# Allegro board 1010309-900-0012_Rev-A.brd
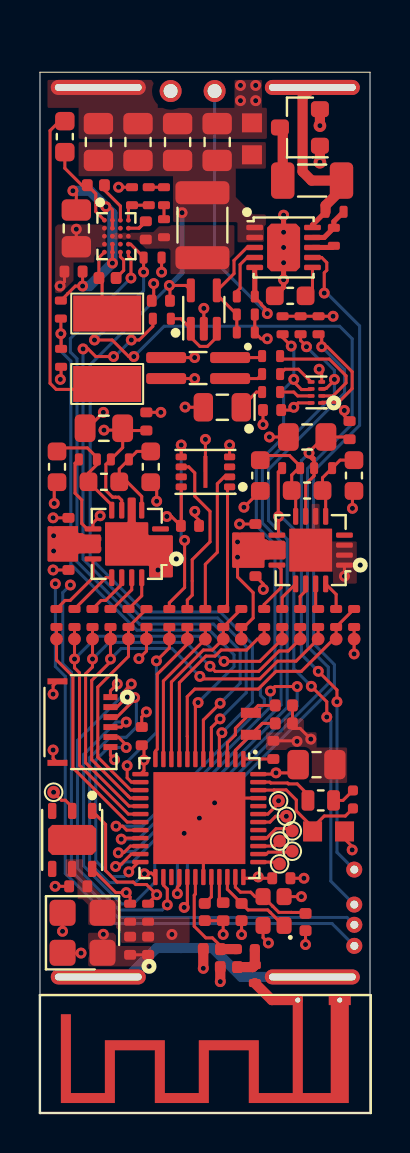
[diagram p0: board, top side]
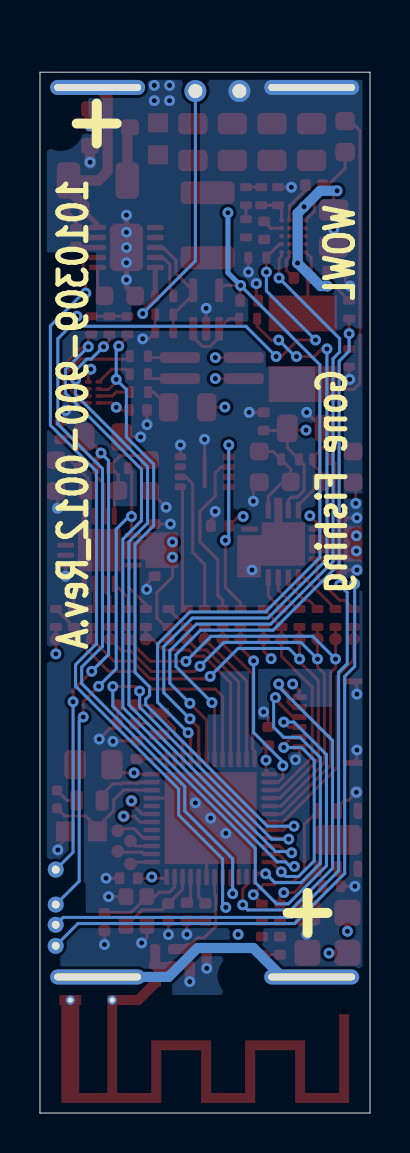
[diagram p1: board, bottom side, seen from below]

Outline 16.51 x 52.07 mm; copper layers: TOP, L2 - GND, L3 - POWER, BOTTOM. Coordinates in mm from the lower left corner of the outline.
Outline path: 0,52.07 0,0 16.51,0 16.51,52.07 0,52.07

## Design rules (mm)
constraint set DEFAULT: min track width 0.152

## Placement (name value [footprint] x y rotation side)
ANT1  Antenna_AN043  [PCBANTENNA_AN043]  8.27 3.2 180 top
B1  HHR70AAAB8T  [PANASONIC_HHR70AAAB8T]  13.62 29.06 90 bottom
B2  HHR70AAAB8T  [PANASONIC_HHR70AAAB8T]  2.92 29.06 270 bottom
C1  1.5nF  [CAPC160X80X90L35N]  0.85 32.33 90 top
C2  0.1uF  [CAPC100X50X55L20N]  1.43 29.32 90 top
C3  0.1uF  [CAPC100X50X55L20N]  1.43 27.62 90 top
C4  0.1uF  [CAPC100X50X55L20N]  5.41 8.37 270 top
C5  15nF  [CAPC160X80X90L35N]  3.2 31.58 0 top
C6  0.1uF  [CAPC100X50X55L20N]  1.92 11.34 180 top
C7  1.5nF  [CAPC160X80X90L35N]  5.54 32.33 270 top
C8  0.1uF  [CAPC100X50X55L20N]  5.32 34.6 90 top
C9  1.5nF  [CAPC160X80X90L35N]  11.02 31.89 90 top
C10  0.1uF  [CAPC100X50X55L20N]  7.5 29.38 0 top
C11  0.1uF  [CAPC100X50X55L20N]  10.78 27.31 90 top
C12  22uF  [CAPC2013X145N]  13.83 17.43 0 top
C13  15nF  [CAPC160X80X90L35N]  13.36 31.14 0 top
C14  0.1uF  [CAPC100X50X55L20N]  12.07 11.74 180 top
C15  0.1uF  [CAPC100X50X55L20N]  5.09 18.85 90 top
C16  DNP  [CAPC1005X55L25N]  9.45 7.3 180 top
C17  1.5nF  [CAPC160X80X90L35N]  15.71 31.89 270 top
C18  0.1uF  [CAPC100X50X55L20N]  15.49 34.16 90 top
C19  0.8pF  [CAPC100X50X55L25N]  8.6 8.2 180 top
C20  0.1uF  [CAPC100X50X55L20N]  10.78 29.01 90 top
C21  0.1uF  [CAPC100X50X55L20N]  11.67 18.17 90 top
C22  DNP  [CAPC1005X55L25N]  8.24 10.05 270 top
C23  12pF  [CAPC100X50X55L25N]  10.08 10.05 270 top
C24  12pF  [CAPC100X50X55L25N]  13.28 9.56 270 top
C25  100pF  [CAPC100X50X56L25N]  9.16 10.07 270 top
C26  1uF  [CAPC1608X94N]  14.44 14.09 0 top
C27  12pF  [CAPC100X50X55L25N]  12.2 19.49 180 top
C28  12pF  [CAPC100X50X55L25N]  12.2 20.39 180 top
C29  10nF  [CAPC160X80X87L35N]  1.24 48.85 270 top
C30  0.1uF  [CAPC100X50X55L20N]  1.68 42.1 180 top
C31  22uF  [CAPC2013X145N]  1.82 44.26 270 top
C32  15nF  [CAPC160X80X90L35N]  12.52 40.88 180 top
C33  1nF  [CAPC100X50X55L25N]  2.8 46.42 0 top
C34  1nF  [CAPC100X50X55L25N]  3.38 41.77 0 top
C35  47nF  [CAPC100X50X55L20N]  5.29 44.16 90 top
C36  22uF  [CAPC2013X145N]  4.9 48.58 90 top
C37  22uF  [CAPC2013X145N]  2.92 48.58 90 top
C38  22uF  [CAPC2013X145N]  8.86 48.58 90 top
C39  22uF  [CAPC2013X145N]  6.88 48.58 90 top
C40  0.1uF  [CAPC100X50X55L20N]  6.05 40.64 180 top
C41  1uF  [CAPC1608X94N]  10.6 48.74 90 top
C42  0.1uF  [CAPC100X50X55L20N]  4.51 8.37 270 top
C43  0.1uF  [CAPC100X50X55L20N]  11.61 35.17 0 top
D1  Green  [LEDC200X125X120L40N]  9.12 35.31 180 top
D2  Red/Yel  [SUNLED_XZM2CRKCYK55W-8]  7.91 37.27 0 top
F1  SF-1206SP200M-2  [FUSC320X160X117L51N]  13.61 46.65 0 top
J1  503480-0600  [MOLEX_503480-0600]  0.22 19.56 270 top
L1  3.9nH  [INDC1005X60L15]  10.3 8.2 0 top
L2  10uH  [ABRACON_AISC-0603F]  14.05 15.64 180 top
L3  15nH  [INDC1005X60L15]  15.66 15.69 270 top
L4  4.7uH  [INDM3225X240N]  8.13 44.42 90 top
NOREF  -  []  -4.58 17.4 0 top
NOREF#2  -  [unnamed#2]  6.47 6.86 0 top
NOREF#3  -  [unnamed#2]  15.49 49.28 0 top
NOREF#4  -  [unnamed#2]  15.49 41.66 0 top
Q2  DMP2035U-7  [SOT23-3P91_240X120L53X44]  13 49.31 90 top
R1  33  [RESC100X50X40L25]  2.63 24.77 90 top
R2  33  [RESC100X50X40L25]  1.73 24.77 90 top
R3  33  [RESC100X50X40L25]  0.83 24.77 90 top
R4  33  [RESC100X50X40L25]  4.43 24.77 90 top
R5  1M  [RESC100X50X40L25]  5.33 24.77 270 top
R6  33  [RESC100X50X40L25]  3.53 24.77 90 top
R7  33  [RESC100X50X40L25]  6.47 24.77 90 top
R8  33  [RESC100X50X40L25]  7.37 24.77 90 top
R9  33  [RESC100X50X40L25]  8.27 24.77 90 top
R10  10K  [RESC100X50X40L25]  10.3 39.95 0 top
R11  1M  [RESC100X50X40L25]  10.07 24.77 270 top
R12  33  [RESC100X50X40L25]  9.17 24.77 90 top
R13  33  [RESC100X50X40L25]  11.21 24.77 90 top
R14  33  [RESC100X50X40L25]  12.11 24.77 90 top
R15  33  [RESC100X50X40L25]  13.01 24.77 90 top
R16  33  [RESC100X50X40L25]  14.81 24.77 90 top
R17  1M  [RESC100X50X40L25]  15.71 24.77 270 top
R18  33  [RESC100X50X40L25]  13.91 24.77 90 top
R19  10K  [RESC100X50X40L25]  10.3 39.05 0 top
R20  10K  [RESC100X50X40L25]  1.05 40.19 90 top
R21  100  [RESC100X50X40L25]  14.16 32.26 180 top
R22  100  [RESC100X50X40L25]  11.56 36.07 180 top
R23  100  [RESC100X50X40L25]  1.06 37.78 270 top
R24  12K  [RESC200X125X70L40N]  13.36 33.82 0 top
R25  12K  [RESC200X125X70L40N]  3.2 34.26 0 top
R26  10K  [RESC100X50X40L25]  6.1 39.74 0 top
R27  10K  [RESC100X50X40L25]  6.2 44.27 270 top
R28  10K  [RESC100X50X40L25]  6.2 45.87 90 top
R29  10K  [RESC100X50X40L25]  5.44 45.87 90 top
R30  140K  [RESC100X50X40L25]  14.74 45.09 180 top
R31  100K  [RESC100X50X40L25]  14.7 43.84 90 top
R32  10K  [RESC100X50X40L25]  5.63 42.8 180 top
R33  10K  [RESC100X50X40L25]  10.3 40.85 180 top
R34  100  [RESC100X50X40L25]  11.56 36.97 180 top
R35  1M  [RESC100X50X40L25]  13.94 39.41 270 top
R36  1M  [RESC100X50X40L25]  13.04 39.41 270 top
R37  1M  [RESC100X50X40L25]  12.14 39.41 270 top
R38  10K  [RESC100X50X40L25]  4.6 45.87 270 top
R39  100  [RESC100X50X40L25]  11.56 37.87 180 top
R43  100  [RESC100X50X40L25]  2.4 32.7 180 top
R44  4.02K  [RESC100X50X40L25]  5.41 10.02 90 top
R45  4.02K  [RESC100X50X40L25]  4.51 10.02 90 top
R46  100  [RESC100X50X40L25]  4 32.7 180 top
R50  100  [RESC100X50X40L25]  12.56 32.26 180 top
R51  0  [RESC100X50X40L25]  10.75 6.95 270 top
RT1  32208551  [HERAEUS_32208551]  20.87 8.89 180 bottom
RT2  10K  [THRMRB220W45L300T300H950]  7.64 51.13 180 bottom
RT3  10k  [TE_GA10K3A1A]  17.52 11.3 180 bottom
TP1  DNP  [TP_C0635]  2.63 23.71 180 top
TP2  DNP  [TP_C0635]  1.73 23.71 180 top
TP3  DNP  [TP_C0635]  0.83 23.71 180 top
TP4  DNP  [TP_C0635]  4.43 23.71 180 top
TP5  DNP  [TP_C0635]  5.33 23.71 180 top
TP6  DNP  [TP_C0635]  3.53 23.71 180 top
TP7  DNP  [TP_C0635]  6.47 23.71 180 top
TP8  DNP  [TP_C0635]  7.37 23.71 180 top
TP9  DNP  [TP_C0635]  8.27 23.71 180 top
TP10  DNP  [TP_C0635]  0.68 16.05 90 top
TP11  DNP  [TP_C0635]  10.07 23.71 270 top
TP12  DNP  [TP_C0635]  9.17 23.71 180 top
TP13  DNP  [TP_C0635]  11.21 23.71 180 top
TP14  DNP  [TP_C0635]  12.11 23.71 180 top
TP15  DNP  [TP_C0635]  13.01 23.71 180 top
TP16  DNP  [TP_C0635]  14.81 23.71 0 top
TP17  DNP  [TP_C0635]  15.71 23.71 180 top
TP18  DNP  [TP_C0635]  13.91 23.71 180 top
TP19  DNP  [TP_C0635]  11.99 13.61 270 top
TP20  DNP  [TP_C0635]  12.62 13.1 180 top
TP21  DNP  [TP_C0635]  11.99 12.46 270 top
TP23  DNP  [TP_C0635]  11.93 15.62 180 top
TP24  DNP  [TP_C0635]  12.32 14.85 0 top
TP25  DNP  [TP_C0635]  14 49.4 270 top
TP26  DNP  [TP_C0635]  14 47.57 180 top
TP27  DNP  [TP_C0635]  12.62 14.11 90 top
TP28  5015  [TP340X180N]  3.36 36.47 0 top
TP29  5015  [TP340X180N]  3.36 40 180 top
U1  SI7051-A20-IMR  [SON7P100_300X300X80L40X40T240X150N]  1.61 13.66 180 top
U2  MS583730BA01-50  [ICDFN4_330X330X285L130X130]  2.13 9.02 180 top
U3  ADS1120IRVAT  [QFN17P50_350X350X100L40X24T214N]  4.34 28.47 90 top
U4  ADS1120IRVAT  [QFN17P50_350X350X100L40X24T214N]  13.54 28.16 90 top
U5  nRF52832-QFAA  [QFN40P600X600X90-49N]  7.97 14.76 180 top
U6  MX25V1635FZUI  [PSON9P50_200X300X60L40X25T160X20N]  8.28 32.08 90 top
U7  LTC4079EDD#TRPBF  [SON11P50_300X300X80L40X25T238X165N]  12.19 43.3 270 top
U8  TS51223  [BGA20NP40_5X4_230X190X57B26N]  3.82 43.87 270 top
U9  LPV521MG/NOPB  [SOT23-5P65_210X110L36X22N]  8.2 40.2 0 top
U10  74LVC3G07GS  [PSON8P35_135X100X35L31X16N]  13.83 36.05 90 top
Y1  32.768kHz  [DFN160X100X50-2NA]  10.55 19.47 270 top
Y2  32MHz  [OSCCC200X160X46-4NA]  11.68 10.11 90 top

## Library data of the parts
ANT1 = Antenna_Shunt
B1 B2 = BATTERY_CELL-1
C1-C43 = CAP
D1 = LED_CA
D2 = LED_BI-Color_RY
F1 = FUSE
J1 = Header_6-Pin_M2
L1-L4 = IND
Q2 = MOSFET_P-CH_GSD
R1-R39 R43-R46 R50 R51 = RES
RT1-RT3 = Thermistor
TP1-TP21 TP23-TP29 = TESTPOINT
U1 = SI7051-A20-IMR
U2 = MS583730BA01-50
U3 U4 = ADS1120IRVAT
U5 = nRF52832-QFAA
U6 = MX25V1635FZUI
U7 = LTC4079
U8 = TS51223
U9 = AMP_1X_5P
U10 = Buffer_3X_8P_OD
Y1 = XTAL1-2
Y2 = XTAL1-3_Case2-4

## Footprints (pads in the part's own frame, mm; a bottom-side part is the same pattern mirrored in y, then rotated)
ABRACON_AISC-0603F
  rrect 0.64x1.02 smd: 1(-0.64,0) 2(0.64,0)
BGA20NP40_5X4_230X190X57B26N
  round 0.24 smd: A1(-0.8,-0.6) A2(-0.8,-0.2) A3(-0.8,0.2) A4(-0.8,0.6) B1(-0.4,-0.6) B2(-0.4,-0.2) B3(-0.4,0.2) B4(-0.4,0.6) C1(0,-0.6) C2(0,-0.2) C3(0,0.2) C4(0,0.6) D1(0.4,-0.6) D2(0.4,-0.2) D3(0.4,0.2) D4(0.4,0.6) E1(0.8,-0.6) E2(0.8,-0.2) E3(0.8,0.2) E4(0.8,0.6)
CAPC100X50X55L20N
  rrect 0.49x0.6 smd: 1(-0.455,0) 2(0.455,0)
CAPC100X50X55L25N
  rrect 0.54x0.6 smd: 1(-0.43,0) 2(0.43,0)
CAPC100X50X56L25N
  rrect 0.53x0.63 smd: 1(-0.45,0) 2(0.45,0)
CAPC160X80X87L35N
  rrect 0.92x0.97 smd: 1(-0.775,0) 2(0.775,0)
CAPC160X80X90L35N
  rrect 0.89x0.93 smd: 1(-0.77,0) 2(0.77,0)
CAPC1005X55L25N
  rrect 0.54x0.6 smd: 1(-0.43,0) 2(0.43,0)
CAPC1608X94N
  rect 0.95x1 smd: 1(-0.8,0) 2(0.8,0)
CAPC2013X145N
  rrect 1.07x1.47 smd: 1(-0.92,0) 2(0.92,0)
DFN160X100X50-2NA
  rect 0.5x1 smd: 1(-0.55,0) 2(0.55,0)
FUSC320X160X117L51N
  rrect 1.17x1.82 smd: 1(-1.47,0) 2(1.47,0)
HERAEUS_32208551
  round 0.8 hole 0.4: 1(5.15,0.527) 2(5.15,-0.527)
ICDFN4_330X330X285L130X130
  rrect 1.3x1.3 smd: 1(-1,1) 2(-1,-1) 3(1,-1) 4(1,1)
INDC1005X60L15
  rrect 0.5x0.5 smd: 1(-0.45,0) 2(0.45,0)
INDM3225X240N
  rrect 1.15x2.7 smd: 1(-1.625,0) 2(1.625,0)
LEDC200X125X120L40N
  rrect 0.97x1.42 smd: 1(-0.95,0) 2(0.95,0)
MOLEX_503480-0600
  rect 0.3x0.7 smd: 1(-1.25,3.3) 2(-0.75,3.3) 3(-0.25,3.3) 4(0.25,3.3) 5(0.75,3.3) 6(1.25,3.3)
  rect 0.3x1 smd: M1(-2.04,0.65) M2(2.04,0.65)
OSCCC200X160X46-4NA
  rrect 0.85x0.75 smd: 1(-0.72,-0.525) 2(0.72,-0.525) 3(0.72,0.525) 4(-0.72,0.525)
PANASONIC_HHR70AAAB8T
  oval 0.75x4.75 hole 0.35x4.35: 1(22.25,0) 2(-22.25,0)
PCBANTENNA_AN043
  round 0.457 hole 0.254: 1(-6.725,-2.45) 2(-4.625,-2.45)
PSON8P35_135X100X35L31X16N
  rrect 0.18x0.35 smd: 1(-0.525,-0.26)
  rrect 0.18x0.34 smd: 2(-0.175,-0.265) 3(0.175,-0.265) 4(0.525,-0.265) 5(0.525,0.265) 6(0.175,0.265) 7(-0.175,0.265) 8(-0.525,0.265)
PSON9P50_200X300X60L40X25T160X20N
  rrect 0.34x0.56 smd: 1(-0.75,-1.21) 2(-0.25,-1.21) 3(0.25,-1.21) 4(0.75,-1.21) 5(0.75,1.21) 6(0.25,1.21) 7(-0.25,1.21) 8(-0.75,1.21)
  rect 1.6x0.2 smd: 9(0,0)
QFN17P50_350X350X100L40X24T214N
  rrect 0.26x0.84 smd: 1(-0.75,-1.69) 2(-0.25,-1.69) 3(0.25,-1.69) 4(0.75,-1.69) 9(0.75,1.69) 10(0.25,1.69) 11(-0.25,1.69) 12(-0.75,1.69)
  rrect 0.84x0.26 smd: 5(1.69,-0.75) 6(1.69,-0.25) 7(1.69,0.25) 8(1.69,0.75) 13(-1.69,0.75) 14(-1.69,0.25) 15(-1.69,-0.25) 16(-1.69,-0.75)
  rect 2.14x2.14 smd: 17(0,0)
QFN40P600X600X90-49N
  rrect 0.22x0.81 smd: 1(-2.2,-2.95) 2(-1.8,-2.95) 3(-1.4,-2.95) 4(-1,-2.95) 5(-0.6,-2.95) 6(-0.2,-2.95) 7(0.2,-2.95) 8(0.6,-2.95) 9(1,-2.95) 10(1.4,-2.95) 11(1.8,-2.95) 12(2.2,-2.95) 25(2.2,2.95) 26(1.8,2.95) 27(1.4,2.95) 28(1,2.95) 29(0.6,2.95) 30(0.2,2.95) 31(-0.2,2.95) 32(-0.6,2.95) 33(-1,2.95) 34(-1.4,2.95) 35(-1.8,2.95) 36(-2.2,2.95)
  rrect 0.81x0.22 smd: 13(2.95,-2.2) 14(2.95,-1.8) 15(2.95,-1.4) 16(2.95,-1) 17(2.95,-0.6) 18(2.95,-0.2) 19(2.95,0.2) 20(2.95,0.6) 21(2.95,1) 22(2.95,1.4) 23(2.95,1.8) 24(2.95,2.2) 37(-2.95,2.2) 38(-2.95,1.8) 39(-2.95,1.4) 40(-2.95,1) 41(-2.95,0.6) 42(-2.95,0.2) 43(-2.95,-0.2) 44(-2.95,-0.6) 45(-2.95,-1) 46(-2.95,-1.4) 47(-2.95,-1.8) 48(-2.95,-2.2)
  rect 4.6x4.6 smd: 49(0,0)
RESC100X50X40L25
  rrect 0.4x0.6 smd: 1(-0.45,0) 2(0.45,0)
RESC200X125X70L40N
  rrect 1.04x1.38 smd: 1(-0.94,0) 2(0.94,0)
SON7P100_300X300X80L40X40T240X150N
  rrect 0.42x0.81 smd: 1(-1,-1.45) 2(0,-1.45) 3(1,-1.45) 4(1,1.45) 5(0,1.45) 6(-1,1.45)
  rrect 2.4x1.5 smd: 7(0,0)
SON11P50_300X300X80L40X25T238X165N
  rrect 0.27x0.84 smd: 1(-1,-1.445) 2(-0.5,-1.445) 3(0,-1.445) 4(0.5,-1.445) 5(1,-1.445) 6(1,1.445) 7(0.5,1.445) 8(0,1.445) 9(-0.5,1.445) 10(-1,1.445)
  rrect 2.38x1.65 smd: 11(0,0)
SOT23-3P91_240X120L53X44
  rrect 0.8x0.9 smd: 1(-0.915,-1) 2(0.915,-1) 3(0,1)
SOT23-5P65_210X110L36X22N
  rrect 0.4x1.19 smd: 1(-0.65,-0.96) 2(0,-0.96) 3(0.65,-0.96) 4(0.65,0.96) 5(-0.65,0.96)
SUNLED_XZM2CRKCYK55W-8
  rrect 2x0.55 smd: 1(1.6,0.525) 2(-1.6,0.525) 3(1.6,-0.525) 4(-1.6,-0.525)
TE_GA10K3A1A
  round 0.8 hole 0.4: 1(1.8,0.875) 2(1.8,-0.875)
THRMRB220W45L300T300H950
  round 1.1 hole 0.7: 1(-1.1,0) 2(1.1,0)
TP340X180N
  rect 3.4x1.8 smd: 1(0,0)
TP_C0635
  round 0.635 smd: 1(0,0)
unnamed#2
  round 0 hole 1.78 unplated: (0,0)

## Nets
GND_POWER: ANT1.1(GND) B2.2 C1.1 C2.2 C3.1 C4.2 C6.2 C7.2 C8.2 C9.1 C10.2 C11.1 C12.2 C14.1 C15.2 C16.2 C17.2 C18.2 C19.2 C20.2 C21.2 C22.2 C23.2 C24.2 C25.2 C26.2 C27.1 C28.1 C30.2 C31.2 C32.2 C36.2 C37.2 C38.2 C39.2 C40.2 C41.2 C42.2 C43.1 J1.6 J1.M1 J1.M2 Q2.1 R10.2 R19.2 R23.2 R24.1 R25.1 R32.1 R38.1 RT2.2 TP10.1(TP) TP26.1(TP) U1.2 U2.1 U3.1 U3.2 U3.3 U3.6 U3.17 U4.1 U4.2 U4.3 U4.6 U4.17 U5.31 U5.45 U5.49 U6.4 U6.9 U7.11 U8.B1 U8.C1 U8.D1 U9.2(V-) U10.4 Y2.2 Y2.4
VBAT: C2.1 C3.2 C4.1 C6.1 C10.1 C11.2 C12.1 C14.2 C15.1 C20.1 C42.1 C43.2 D1.2 D2.2 D2.4 J1.1 Q2.2(S) R5.2 R11.2 R17.2 R35.1 R36.1 R37.1 R44.1 R45.1 TP5.1(TP) TP11.1(TP) TP17.1(TP) TP25.1(TP) U1.5(VDD) U2.2(VDD) U3.10 U3.11 U4.10 U4.11 U5.13 U5.36 U5.48 U6.8 U10.8
VBAT_IN: B1.1(POS) F1.2 R30.2 U7.10
ANALOGSPARE1: TP27.1(TP) U5.40
BLE_NRESET: J1.5 U5.24
BLE_SWDCLK: J1.3 U5.25
BLE_SWDIO: J1.2 U5.26
BLE_SWO: J1.4 U5.21
DIN: R1.1 R15.1 TP1.1(TP) TP15.1(TP) U5.17
DOUT: R2.1 R14.1 TP2.1(TP) TP14.1(TP) U5.18
ICHG: R26.1 U5.5
ICHG_NOT_BUFFERED: R10.1 R19.1 U7.3 U9.4
LED1: R35.2 U5.23 U10.1
LED2: R36.2 U5.22 U10.3
LED3: R37.2 U5.20 U10.6
LFSPARE2: TP21.1(TP) U5.37
LFSPARE3: TP20.1(TP) U5.38
LFSPARE4: TP19.1(TP) U5.39
MEM_CS: R11.1 R12.1 TP12.1(TP) U5.10
MEM_SCLK: R8.1 TP8.1(TP) U5.12
MEM_SDI: R7.1 TP7.1(TP) U5.14
MEM_SDO: R9.1 TP9.1(TP) U5.11
MOD_CFG: R32.2 U5.28 U8.D4
MOD_EN: U5.6 U8.E4
NCHRG: U5.29 U7.7
NTC: R50.2 RT3.2 U4.9
NTC_DRDY: R13.1 TP13.1(TP) U5.9
NTC_NCS: R16.1 R17.1 TP16.1(TP) U5.8
NTC_RTN: C18.1 R21.2 R24.2 RT3.1(C1) U4.7
PDC: C30.1 C31.1 R20.2 U8.A2 U8.B2 U8.D2 U8.E2
PDC_MEASURE: R20.1 R23.1 U5.7
RTD: R43.2 RT1.2 U3.9
RTD_DRDY: R3.1 TP3.1(TP) U5.19
RTD_NCS: R4.1 R5.1 TP4.1(TP) U5.15
RTD_RTN: C8.1 R25.2 R46.2 RT1.1(C1) U3.7
SCL: R45.2 TP23.1(TP) U1.6 U2.3 U5.43
SCLK: R6.1 R18.1 TP6.1(TP) TP18.1(TP) U5.16
SDA: R44.2 TP24.1(TP) U1.1 U2.4 U5.42
VAC1: C29.2 C33.1 U8.A1
VAC2: C34.1 TP29.1(TP) U8.E1(VAC2)
VCHG: C36.1 C37.1 C38.1 C39.1 C40.1 C41.1 L4.2 U5.4 U7.1 U7.2 U9.5
N14972901: R4.2 U3.16
N14972967: R6.2 U3.15(SCLK)
N14972993: R1.2 U3.14
N14973027: R2.2 U3.13
N14973057: R3.2 U3.12
N15057205: R12.2 U6.1
N15057239: R8.2 U6.6
N15057265: R7.2 U6.5
N15057295: R9.2 U6.2
N15062741: C16.1 L1.2 R51.1
N15062907: C19.1 L1.1 U5.30
N15063377: C21.1 U5.1
N15063381: C22.1 U5.32
N15063385: C25.1 U5.33
N15063389: C26.1 L3.2 U5.46
N15063393: L2.2 U5.47
N15063409: C27.2 U5.2 Y1.2
N15063413: C28.2 U5.3 Y1.1
N15063417: C23.1 U5.34 Y2.1
N15063421: C24.1 U5.35(XC2) Y2.3(OUTPUT)
N15063699: L2.1 L3.1
N15069355: F1.1 Q2.3
N15069411: B1.2 B2.1(POS)
N15070172: R30.1 R31.2 U7.9
N15070236: R31.1 U7.8
N15070276: C32.1 U7.6(TIMER)
N15070284: R33.2 U7.4
N15070288: R33.1 RT2.1(C1) U7.5
N15073165: C29.1 TP28.1(TP)
N15073843: C33.2 U8.A3
N15073877: C34.2 U8.E3
N15077254: C1.2 C5.1 R43.1 U3.8
N15077263: C5.2 C7.1 R46.1 U3.5
N15077599: C35.2 U8.B4
N15078736: C35.1 L4.1 R27.2 U8.C2 U8.C3 U8.C4
N15079118: R29.1 R38.2 U8.A4
N15086386: C9.2 C13.1 R50.1 U4.8
N15086624: R16.2 U4.16
N15086650: R18.2 U4.15(SCLK)
N15086654: C13.2 C17.1 R21.1 U4.5
N15086674: R15.2 U4.14
N15086718: R14.2 U4.13
N15086748: R13.2 U4.12
N15130659: R26.2 U9.1 U9.3
N15135795: R27.1 R28.1
N15135807: R28.2 R29.2
N15156180: ANT1.2 R51.2
N15172554: R34.1 U10.5
N15172558: R39.1 U10.2(3Y)
N15173046: D2.3(C-YEL) R34.2
N15173050: D2.1 R39.2
N15197976: D1.1(C) R22.2
N15197980: R22.1 U10.7

Pads without a net: U1 3 4 7; U3 4; U4 4; U5 27 41 44; U6 3 7; U8 B3 D3

## Via types
v1: diameter 0.546, hole 0.254, TOP to BOTTOM, 142 vias

## Routing (per net, layer and track width the routed paths; a pad name or vN(x,y) marks a point on that pad's centre or on a via; arc(x,y) is an arc through that point)
GND_POWER: length 54.8
  TOP w0.152: R23.2 1.06,36.74 v1(1.02,36.7) ; C24.2 v1(13.28,8.43) ; v1(0.66,18.16) 0.66,17.74 J1.M2 ; R24.1 v1(11.48,33.82) ; C17.2 15.63,31.05 v1(15.63,30.25) ; C22.2 C25.2 v1(9.16,8.93) ; C3.1 v1(0.66,27.17) ; v1(3.17,35.05) 2.38,34.26 R25.1 ; U6.9 v1(8.28,33.7) ; C4.2 C42.2 ; C18.2 15.22,34.88 v1(15.22,35.15) ; U1.2 1.61,15.31 1.27,15.65 1.07,15.65 0.68,16.04 v1(0.68,16.05) ; R32.1 v1(6.08,42.07) ; C10.2 7.96,29.66 7.74,29.87 v1(7.74,30.1) ; C21.2 12.83,18.62 v1(12.86,18.59) ; v1(11.16,34.44) C43.1 ; C40.2 5.69,40.73 v1(5.69,41.5) ; Y2.4 11.16,8.78 v1(11.43,8.51) ; C11.1 11.17,26.47 v1(11.17,26.2) ; v1(11.37,38.73) 11.06,38.73 R19.2 R10.2 ; J1.M1 0.66,21.38 v1(0.66,20.95) ; C14.1 v1(13.2,11.74) ; C23.2 v1(10.08,8.93) ; C2.2 v1(0.66,29.78) ; v1(13.55,18.71) 13.01,19.24 12.63,19.24 C27.1 C28.1 ; U4.1 v1(15.23,26.86) ; U3.1 5.9,27.59 5.9,27.37 v1(5.9,27.17) ; U9.2 v1(8.2,40.26) ; C7.2 5.84,31.26 v1(5.84,30.61) ; v1(0.76,11.34) C6.2 1.42,11.38 ; C15.2 5.09,19.81 5.32,20.04 v1(5.32,20.07) ; C9.1 v1(10.2,30.31) ; v1(1.01,41.37) 1.22,41.59 C30.2 ; C20.2 v1(9.98,29.47) ; U6.4 v1(9.49,33.42) ; v1(15.62,13.16) 15.62,13.33 15.24,13.72 C26.2 ; C8.2 v1(6.05,35.05) ; v1(3.73,17.68) 3.71,17.7 3.71,17.71 3.52,17.89 J1.6 ; v1(1.82,44.22) C31.2 1.95,43.47 ; v1(13.97,37.21) 14.09,37.08 U10.4 ; U5.45 8.97,15.76 v1(8.74,15.52) v1(7.97,14.76) 7.97,12.72 8.17,12.52 U5.31 ; v1(3.93,46.32) R38.1 ; Y2.2 v1(13.08,10.83) ; 14.75,17.63 C12.2 ; v1(0.71,30.5) 0.71,31.42 C1.1
  TOP w0.254: C32.2 12.19,41.32 v1(12.19,41.69) v1(12.19,42.54) v1(12.19,43.3) v1(12.19,44.06) v1(12.19,44.92)
  TOP w0.508: C19.2 v1(8.17,7.24) ; Q2.1 v1(14,47.57) ; C16.2 v1(9.02,6.57)
  L2 - GND w0.508: 13.97,5.97 14.68,5.97 ANT1.1
  vias: v1(3.17,8.94) v1(7.21,13.99) v1(10.03,51.41) v1(10.03,50.65) v1(10.79,51.41) v1(10.79,50.65)
VBAT: length 25.5
  TOP w0.152: C43.2 12.56,35.17 v1(12.7,35.31) 12.92,35.53 U10.8 ; v1(4.95,22.73) 5.33,23.11 TP5.1 R5.2 ; C15.1 5.2,18.29 v1(5.2,17.65) 5.2,17.13 U5.13 ; D1.2 7.27,35.31 v1(7.26,35.32) ; v1(15.71,22.97) TP17.1 R17.2 ; C14.2 10.98,11.74 ; 10.98,11.74 v1(10.92,11.81) ; 10.98,11.74 10.23,11.74 U5.36 ; C10.1 6.93,29.49 ; 6.93,29.49 6.58,29.84 v1(6.35,29.84) ; 6.93,29.49 7.07,29.63 U6.8 ; D2.2 v1(7.74,37.79) ; R37.1 R36.1 R35.1 v1(14.66,39.86) ; v1(3.87,21.46) 3.52,21.12 J1.1 ; U5.48 11.74,16.96 v1(11.81,17.02) 12.5,17.02 C12.1 ; D2.4 v1(7.74,36.74) ; TP11.1 R11.2 10.21,24.31 10.66,24.77 10.66,26.04 9.88,26.82 v1(9.88,27.81)
  TOP w0.508: Q2.2 v1(14,49.4)
  vias: v1(0.68,28.88) v1(0.68,28.12) v1(6.6,8.94) v1(9.88,28.57)
VBAT_IN: length 9.5
  TOP w0.254: R30.2 13.63,44.43 U7.10
  TOP w0.508: B1.1 13.14,50.82 13.14,47.1 13.59,46.65 F1.2 15.08,46.2 14.29,45.41 R30.2
ANALOGSPARE1: length 1.9
  TOP w0.152: U5.40 11.34,13.76 11.81,14.22 12.51,14.22 TP27.1
BLE_NRESET: length 10.8
  TOP w0.152: J1.5 3.92,18.81 4.31,18.42 v1(4.31,18.29) ; U5.24 4.93,12.56 v1(4.44,12.06)
  BOTTOM w0.152: v1(4.31,18.29) 3.43,18.29 2.79,17.65 2.79,12.62 3.58,11.83 4.21,11.83 v1(4.44,12.06)
BLE_SWDCLK: length 15.4
  TOP w0.152: U5.25 5.57,12 5.27,12 5.24,11.97 v1(5.23,11.97) ; J1.3 3.85,19.81 4.73,20.69 v1(4.73,20.78)
  BOTTOM w0.152: v1(5.23,11.97) 5.2,11.97 4.76,11.53 3.45,11.53 2.49,12.49 2.49,17.78 3.5,18.8 4.31,18.8 4.82,19.3 4.82,20.7 v1(4.73,20.78)
BLE_SWDIO: length 19
  TOP w0.152: J1.2 3.85,20.31 4.1,20.56 4.1,20.99 4.37,21.26 4.37,21.27 v1(4.57,21.46) ; U5.26 6.17,11.4 6.37,11.21 v1(6.37,10.41)
  BOTTOM w0.152: v1(6.37,10.41) 6.12,10.16 3.96,10.16 1.88,12.24 1.88,18.64 4.57,21.33 v1(4.57,21.46)
BLE_SWO: length 40.2
  TOP w0.152: v1(12.87,21.34) 11.75,21.34 v1(11.53,21.11) ; J1.4 4.06,19.31 v1(4.31,19.56) ; v1(4.07,13.7) 4.12,13.76 U5.21
  BOTTOM w0.152: v1(4.07,13.7) 4.92,13.7 11.53,20.31 v1(11.53,21.11) ; v1(12.87,21.34) 12.87,20.36 5.74,13.23 5.74,11.53 4.67,10.46 4.08,10.46 2.18,12.37 2.18,17.93 3.81,19.56 v1(4.31,19.56)
DIN: length 23.2
  TOP w0.152: R15.1 TP15.1 12.42,23.11 11.96,23.11 10.94,22.1 8.76,22.1 v1(8.51,22.35) ; R1.1 TP1.1 v1(2.63,22.71) 2.63,22.32 2.28,21.97 2.28,17.53 4.45,15.36 U5.17
  BOTTOM w0.152: v1(8.51,22.35) 7.31,23.55 3.46,23.55 v1(2.63,22.71)
DOUT: length 23.5
  TOP w0.152: v1(9.21,22.6) 11,22.6 TP14.1 R14.1 ; U5.18 4.42,14.96 1.98,17.4 1.98,22.02 1.73,22.27 v1(1.73,22.71) TP2.1 R2.1
  BOTTOM w0.152: v1(1.73,22.71) 2.86,23.85 7.95,23.85 v1(9.21,22.6)
ICHG: length 31.5
  TOP w0.152: v1(3.68,37.85) 2.79,37.85 2.41,38.23 v1(2.16,38.23) ; v1(9.01,19.72) 8.57,19.28 U5.5 ; v1(4.57,38.67) 4.96,38.67 5.65,39.36 R26.1
  BOTTOM w0.152: v1(4.57,38.67) 3.74,37.85 v1(3.68,37.85) ; v1(9.01,19.72) 10.32,21.03 10.32,23.33 8.89,24.77 5.1,24.77 2.16,27.71 v1(2.16,38.23)
ICHG_NOT_BUFFERED: length 5.7
  TOP w0.152: R19.1 R10.1 8.85,40.95 U9.4 8.87,41.16 9.71,41.99 9.71,42.65 10.35,43.3 U7.3
LED1: length 39.3
  TOP w0.152: R35.2 14.09,38.81 v1(14.09,38.34) 14.36,38.34 15.62,37.09 15.62,36.24 14.93,35.56 14.12,35.56 U10.1 ; v1(3.78,12.33) 3.9,12.45 4.06,12.45 4.57,12.96 U5.23
  BOTTOM w0.152: v1(3.78,12.33) 4,12.33 4.23,12.57 4.64,12.57 12.37,20.29 12.37,28.7 11.43,29.64 11.43,32.2 12.8,33.57 12.8,33.58 15.24,36.02 15.24,37.19 v1(14.09,38.34)
LED2: length 34.6
  TOP w0.152: R36.2 13.04,38.65 13.33,38.35 v1(13.33,38.34) ; v1(14.73,36.7) 14.73,36.66 14.33,36.26 14.28,36.26 14.25,36.23 U10.3 ; v1(3.92,13.02) 3.93,13.03 4.2,13.03 4.52,13.36 U5.22
  BOTTOM w0.152: v1(13.33,38.34) 13.95,37.72 14.17,37.72 14.73,37.16 v1(14.73,36.7) 14.73,35.94 12.49,33.71 12.49,33.7 11.13,32.33 11.13,29.51 12.06,28.58 12.06,20.42 4.72,13.08 3.98,13.08 v1(3.92,13.02)
LED3: length 32.7
  TOP w0.152: v1(12.57,38.37) 12.14,38.8 R37.2 ; v1(12.7,36.7) 12.7,36.58 13.08,36.2 13.53,36.2 U10.6 ; U5.20 4.33,14.16 4.14,14.35 v1(3.81,14.35)
  BOTTOM w0.152: v1(12.57,38.37) 12.7,38.24 v1(12.7,36.7) 12.19,36.2 12.19,33.82 10.82,32.46 10.82,29.38 11.76,28.45 11.76,22.05 11.03,21.32 11.03,20.9 11.22,20.7 11.22,20.44 5.13,14.35 v1(3.81,14.35)
LFSPARE2: length 1.1
  TOP w0.152: TP21.1 11.89,12.56 U5.37
LFSPARE3: length 1.8
  TOP w0.152: U5.38 11.33,12.96 11.42,13.05 12.57,13.05 TP20.1
LFSPARE4: length 1.2
  TOP w0.152: TP19.1 11.73,13.36 U5.39
MEM_CS: length 9.2
  TOP w0.152: U5.10 6.57,21.56 8.17,23.16 8.63,23.16 TP12.1 R12.1 R11.1
MEM_SCLK: length 7.3
  TOP w0.152: U5.12 5.77,17.91 5.77,18.11 5.87,18.2 5.87,21.96 7.37,23.46 TP8.1 R8.1
MEM_SDI: length 9.2
  TOP w0.152: v1(4.36,17.38) 4.36,16.77 4.57,16.56 U5.14 ; v1(5.82,22.62) 6.47,23.27 TP7.1 R7.1
  BOTTOM w0.152: v1(4.36,17.38) 4.36,17.57 5.82,19.04 v1(5.82,22.62)
MEM_SDO: length 7.5
  TOP w0.152: U5.11 6.17,21.61 TP9.1 R9.1
MOD_CFG: length 53.4
  TOP w0.152: U5.28 6.97,11.6 6.97,11.4 6.87,11.3 v1(6.87,10.97) ; v1(4.7,37.85) 4.44,37.85 3.61,38.67 v1(2.73,38.67) ; U8.D4 4.53,43.47 5.18,42.82 R32.2 v1(5.18,42.07)
  BOTTOM w0.152: v1(6.87,10.97) 6.87,12.72 9.27,15.11 9.27,16.33 14.42,21.49 14.42,22.31 13.38,23.35 13.38,32.23 15.62,34.47 15.62,38.73 14.99,39.36 6.21,39.36 v1(4.7,37.85) ; v1(5.18,42.07) 5.18,41.13 v1(2.73,38.67)
MOD_EN: length 33.1
  TOP w0.152: U5.6 8.17,19.66 v1(9.01,20.5) ; U8.E4 4.42,42.87 4.55,42.74 v1(4.55,41.78)
  BOTTOM w0.152: v1(4.55,41.78) 1.52,38.74 1.52,38.07 1.85,37.74 1.85,27.58 4.97,24.46 8.68,24.46 10.01,23.13 10.01,21.5 v1(9.01,20.5)
NCHRG: length 40
  TOP w0.152: v1(14.22,41.02) 14.22,42.04 14.35,42.16 14.35,42.55 14.09,42.8 U7.7 ; v1(7.21,10.29) 7.37,10.45 U5.29
  BOTTOM w0.152: v1(14.22,41.02) 14.35,41.02 15.99,39.38 15.99,34.41 13.69,32.11 13.69,23.47 14.73,22.43 14.73,21.36 9.57,16.2 9.57,14.91 7.37,12.71 7.37,10.45 v1(7.21,10.29)
NTC: length 24.5
  TOP w0.152: v1(14.35,19.81) 14.35,20.57 v1(13.57,21.35) ; R50.2 11.92,32.07 11.92,29.99 11.93,29.97 v1(11.93,29.84) 11.93,29 11.85,28.92 U4.9
  BOTTOM w0.152: v1(11.93,29.84) 12.06,29.84 12.7,29.21 12.7,22.22 v1(13.57,21.35) ; v1(14.35,19.81) 14.55,19.61 14.55,11.6 RT3.2
NTC_DRDY: length 9.6
  TOP w0.152: U5.9 6.97,21.53 8.3,22.86 8.76,22.86 9.06,23.16 10.33,23.16 10.88,23.71 TP13.1 R13.1
NTC_NCS: length 13.6
  TOP w0.152: U5.8 7.37,18.84 7.37,18.85 7.37,20.83 7.74,21.21 10.92,21.21 11.81,22.1 13.08,22.1 14.69,23.71 TP16.1 R16.1 R17.1
NTC_RTN: length 28.5
  TOP w0.152: v1(13.92,22.1) 14.86,21.17 v1(14.86,20.57) ; 13.71,32.6 R21.2 13.71,31.88 13.29,31.46 U4.7 ; 13.71,32.6 13.44,32.88 13.44,33.05 14.21,33.82 R24.2 15.37,33.82 C18.1 ; 13.71,32.6 13.71,32.76 v1(13.46,33.02)
  BOTTOM w0.152: v1(13.92,22.1) 13.08,22.94 13.08,32.64 v1(13.46,33.02) ; v1(14.86,20.57) 14.86,13.05 RT3.1
PDC: length 12.3
  TOP w0.152: v1(3.3,45.34) 3.47,45.34 3.62,45.19 U8.A2 U8.B2 ; C31.1 1.82,45.93 1.65,46.1 v1(1.65,46.14) ; C30.1 v1(2.13,41.37) 1.77,41.37 1.39,41 1.39,40.99 R20.2 ; v1(3.62,42.52) U8.E2 U8.D2
  BOTTOM w0.508: v1(2.13,41.37) 2.47,41.37 v1(3.62,42.52) 3.62,45.01 v1(3.3,45.34) 2.5,46.14 v1(1.65,46.14)
PDC_MEASURE: length 29.3
  TOP w0.152: R23.1 1.06,38.82 1.05,38.83 v1(1.05,38.99) R20.1 ; v1(7.91,20.54) 7.77,20.4 U5.7
  BOTTOM w0.152: v1(7.91,20.54) 9.71,22.33 9.71,22.93 8.48,24.16 4.85,24.16 1.55,27.46 1.55,37.61 1.05,38.11 v1(1.05,38.99)
RTD: length 39.9
  TOP w0.152: R43.2 1.75,32.51 1.75,31.01 2.09,30.67 2.09,29.49 2.36,29.22 U3.9 2.65,29.52 3.01,29.88 v1(3.01,29.88)
  L3 - POWER w0.152: v1(0.77,26.48) 3.01,28.72 v1(3.01,29.88)
  BOTTOM w0.152: RT1.2 14.61,9.48 3.77,9.48 1.27,11.99 1.27,21.84 0.77,22.34 v1(0.77,26.48)
RTD_DRDY: length 11.9
  TOP w0.152: U5.19 4.36,14.56 1.65,17.27 1.65,21.84 0.83,22.66 TP3.1 R3.1
RTD_NCS: length 11.3
  TOP w0.152: U5.15 4.54,16.16 2.89,17.81 2.89,21.31 4.43,22.85 TP4.1 R4.1 ; R4.1 4.44,24.33 ; R4.1 4.44,24.33 ; 4.44,24.33 R5.1
RTD_RTN: length 45.8
  TOP w0.152: R25.2 4.04,34.16 v1(3.2,34.16) ; R25.2 4.14,33.29 R46.2 3.3,32.45 3.3,32.02 3.29,32.01 3.29,31.15 3.63,30.81 3.94,30.81 4.09,30.66 U3.7 ; R25.2 4.25,34.14 C8.1
  L3 - POWER w0.152: v1(3.2,34.16) 3.2,30.45 3.55,30.1 3.55,28.45 v1(1.52,26.42)
  BOTTOM w0.152: v1(1.52,26.42) 1.14,26.04 1.14,22.48 1.57,22.05 1.57,12.11 3.9,9.79 15.36,9.79 RT1.1
SCL: length 19
  TOP w0.152: v1(11.93,15.62) 11.93,15.49 11.4,14.96 U5.43 ; U1.6 3.8,11.03 v1(4.31,11.03) 4.31,11 4.51,10.81 R45.2 ; U2.3 v1(1.13,9.09)
  L3 - POWER w0.152: v1(11.93,15.62) 11.68,15.37 11.68,15.01 8.99,12.32 6.47,12.32 5.18,11.03 v1(4.31,11.03) 4.31,10.96 4.16,10.81 2.56,10.81 1.13,9.38 v1(1.13,9.09)
SCLK: length 22.9
  TOP w0.152: v1(8,21.84) 8.12,21.72 10.99,21.72 11.88,22.61 12.81,22.61 TP18.1 R18.1 ; U5.16 4.51,15.76 4.42,15.85 2.59,17.68 2.59,21.64 3.53,22.58 v1(3.53,22.71) TP6.1 R6.1
  BOTTOM w0.152: v1(3.53,22.71) 3.53,22.71 4.06,23.24 6.6,23.24 v1(8,21.84)
SDA: length 23.6
  TOP w0.152: v1(2.05,8) 1.15,8 U2.4 ; U5.42 11.5,14.56 11.79,14.85 v1(12.32,14.85) ; R44.2 5.41,10.49 v1(5.84,10.92) 5.33,11.43 4.79,11.43 4.67,11.56 3.85,11.56 3.28,12.13 3.28,14.44 U1.1
  L3 - POWER w0.152: v1(12.32,14.85) 11.94,14.85 9.04,11.94 6.85,11.94 v1(5.84,10.92) 5.42,10.5 2.68,10.5 2.05,9.88 v1(2.05,8)
VAC1: length 4.4
  TOP w0.152: U8.A1 2.79,45.1 2.79,45.99 C33.1 2.09,46.42 1.24,47.27 C29.2
VAC2: length 3.4
  TOP w0.152: TP29.1 3.11,40.25 3.11,41.61 C34.1 2.95,42.79 U8.E1
VCHG: length 37.5
  TOP w0.152: v1(9.1,19.03) 9.01,18.94 9.01,18.92 8.97,18.88 U5.4 ; U9.5 7.3,41.4 v1(6.47,41.4) 6.5,41.37 C40.1
  BOTTOM w0.152: 6.54,41.47 v1(6.47,41.4) 2.51,37.44 2.51,27.79 5.23,25.07 9.01,25.07 10.63,23.46 10.63,20.55 v1(9.1,19.03)
  BOTTOM w0.254: v1(7.11,45.04) 7.11,42.04 6.54,41.47
N14972901: length 1.8
  TOP w0.152: U3.16 5.09,25.88 R4.2
N14972967: length 2.1
  TOP w0.152: U3.15 4.59,26.18 3.63,25.22 R6.2
N14972993: length 2.3
  TOP w0.152: R1.2 3.06,25.64 3.28,25.64 4.09,26.45 U3.14
N14973027: length 2.5
  TOP w0.152: U3.13 3.29,26.78 R2.2
N14973057: length 3.4
  TOP w0.152: U3.12 2.65,26.78 1.51,25.64 1.26,25.64 R3.2
N15057205: length 6.2
  TOP w0.152: U6.1 9.38,31.22 9.38,25.43 R12.2
N15057239: length 8.4
  TOP w0.152: U6.6 7.44,32.33 7.74,32.02 7.74,30.86 8.51,30.1 8.51,28.57 7.62,27.69 7.62,26.62 7.62,25.91 7.37,25.66 R8.2
N15057265: length 9.2
  TOP w0.152: R7.2 6.47,25.52 7.23,26.29 7.23,26.62 7.24,27.74 v1(7.24,28.65) ; U6.5 v1(7.07,33.42)
  BOTTOM w0.152: v1(7.24,28.65) 7.07,28.82 v1(7.07,33.42)
N15057295: length 7.3
  TOP w0.152: U6.2 9.22,31.83 8.87,31.48 8.87,30.95 8.87,28.05 8.27,27.45 R9.2
N15062741: length 1.7
  TOP w0.508: L1.2 10.75,7.4 R51.1 10.65,7.3 C16.1
N15062907: length 5.2
  TOP w0.152: C19.1 9.03,8.36 8.63,8.76 8.29,8.76 7.72,9.34 7.72,10.89 7.77,10.95 U5.30
  TOP w0.508: L1.1 C19.1
N15063377: length 1.5
  TOP w0.152: C21.1 10.18,17.71 U5.1
N15063381: length 1.5
  TOP w0.152: U5.32 8.57,10.81 C22.1
N15063385: length 1.4
  TOP w0.152: U5.33 8.97,10.72 C25.1
N15063389: length 6.4
  TOP w0.152: L3.2 15.28,14.86 14.22,14.86 13.64,14.27 ; 13.64,14.27 13.64,14.3 12.82,15.11 12.82,15.66 12.32,16.17 11.71,16.17 11.7,16.16 U5.46 ; 13.64,14.27 C26.1
N15063393: length 3
  TOP w0.152: U5.47 11.5,16.56 11.54,16.51 12.39,16.51 12.43,16.47 12.87,16.47 13.41,15.93 L2.2
N15063409: length 3
  TOP w0.152: U5.2 9.77,18.15 Y1.2 11.12,19.49 C27.2
N15063413: length 4.2
  TOP w0.152: C28.2 10.92,20.39 Y1.1 9.78,19.25 9.78,18.92 9.37,18.52 9.37,17.91 U5.3
N15063417: length 4.2
  TOP w0.152: U5.34 9.37,11.19 C23.1 10.41,10.16 11.39,10.16 11.51,10.04 11.52,10.04 12.17,9.39 Y2.1
N15063421: length 4.6
  TOP w0.152: C24.1 13.24,10.03 12.57,10.03 12.57,10.04 11.95,10.04 11.64,10.34 11.64,10.34 Y2.3 10.76,10.83 10.54,11.05 10.03,11.05 9.77,11.3 U5.35
N15063699: length 1.2
  TOP w0.152: L3.1 15.16,15.64 L2.1
N15069355: length 2.7
  TOP w0.508: Q2.3 12.14,49.17 F1.1
N15069411: length 11.9
  BOTTOM w0.508: B2.1 4.39,6.81 5.84,8.25 5.89,8.25 5.89,8.26 7.05,8.26 7.05,8.25 8.63,8.25 10.08,6.81 B1.2
N15070172: length 2.3
  TOP w0.254: U7.9 14.22,43.8 R31.2 14.7,44.6 R30.1
N15070236: length 1.1
  TOP w0.254: R31.1 14.62,43.3 U7.8
N15070276: length 1.6
  TOP w0.152: C32.1 13.63,41.23 U7.6
N15070284: length 2.5
  TOP w0.152: U7.4 10.36,42.8 10.01,42.45 10.01,41.27 9.85,41.1 R33.2
N15070288: length 14.8
  TOP w0.152: v1(11.37,39.99) 11.25,40.12 11.25,40.27 11.07,40.45 11.07,40.49 10.77,40.79 10.77,40.83 R33.1
  TOP w0.254: R33.1 10.75,41.88 10.74,41.89 U7.5
  BOTTOM w0.152: RT2.1 8.74,42.63 v1(11.37,39.99)
N15073165: length 16.7
  TOP w0.152: TP28.1 3.09,36.2 0.81,36.2 0.5,36.51 0.5,49.15 0.98,49.62 C29.1
N15073843: length 2.1
  TOP w0.152: C33.2 3.23,46.17 4.02,45.38 U8.A3
N15073877: length 1.5
  TOP w0.152: U8.E3 4.02,42.84 4.19,42.67 4.19,42.15 C34.2
N15077254: length 5.6
  TOP w0.152: C1.2 1.03,33.27 2.37,33.27 2.85,32.8 R43.1 2.85,32.44 2.43,32.02 C5.1 3.59,30.42 U3.8
N15077263: length 4.7
  TOP w0.152: U3.5 5.09,30.85 4.36,31.58 C5.2 3.97,32.22 R46.1 4.85,33.1 C7.1
N15077599: length 1.5
  TOP w0.152: C35.2 4.95,44.27 ; 4.95,44.27 U8.B4 ; 4.95,44.27 4.95,44.27 5.29,44.61
N15079118: length 1.7
  TOP w0.152: R29.1 R38.2 4.57,45.42 4.42,45.26 U8.A4
N15086386: length 5.1
  TOP w0.152: C9.2 11.25,32.89 12.48,32.89 13.01,32.36 R50.1 12.94,32.26 12.59,31.92 C13.1 12.64,31.14 12.79,30.99 U4.8
N15086624: length 1.5
  TOP w0.152: U4.16 14.81,25.95 R16.2
N15086650: length 1.3
  TOP w0.152: R18.2 13.79,25.34 U4.15
N15086654: length 4
  TOP w0.152: U4.5 14.29,30.91 14.11,31.09 14.11,31.12 C13.2 14.13,31.78 R21.1 15.01,32.66 C17.1
N15086674: length 1.4
  TOP w0.152: R15.2 13.01,25.85 13.29,26.12 U4.14
N15086718: length 1.5
  TOP w0.152: R14.2 12.11,25.8 U4.13
N15086748: length 2.6
  TOP w0.152: R13.2 11.21,25.44 12.06,26.29 12.06,27.2 U4.12
N15130659: length 3.7
  TOP w0.152: U9.3 8.85,38.82 8.38,38.35 8,38.35 7.55,38.8 U9.1 7.05,39.74 R26.2
N15135795: length 0.7
  TOP w0.152: R27.1 R28.1
N15135807: length 0.8
  TOP w0.152: R28.2 R29.2
N15156180: length 2.5
  TOP w0.508: R51.2 11.6,5.65 ANT1.2
N15172554: length 1.9
  TOP w0.152: U10.5 12.93,37.21 12.25,37.21 R34.1
N15172558: length 5.6
  TOP w0.152: U10.2 14.66,35.88 15.31,36.52 15.31,36.88 14.47,37.72 12.16,37.72 R39.1
N15173046: length 1.7
  TOP w0.152: R34.2 10.89,36.74 D2.3
N15173050: length 1.6
  TOP w0.152: R39.2 11.04,37.79 D2.1
N15197976: length 1.4
  TOP w0.152: D1.1 10.83,36.07 R22.2
N15197980: length 1.6
  TOP w0.152: R22.1 12.7,36.07 12.89,35.88 U10.7

## Copper pours and planes (outline as drawn; the poured copper is in the pictures)
GND_POWER on TOP (solid shape): 13.15,1 14.55,1 14.55,5.4 14.45,5.4 14.45,5.9 15.55,5.9 15.55,5.4 15.45,5.4 15.45,0.5 10.45,0.5 10.45,3.14 8.45,3.14 8.45,0.5 5.75,0.5 5.75,3.14 3.75,3.14 3.75,0.5 1.05,0.5 1.05,4.94 1.55,4.94 1.55,1 3.25,1 3.25,3.64 6.25,3.64 6.25,1 7.95,1 7.95,3.64 10.95,3.64 10.95,1 12.65,1 12.65,5.9 13.15,5.9
GND_POWER on TOP: 11.3,18.16 11.3,19.05 12.19,19.05 12.19,20.83 13.2,20.83 13.2,19.05 13.84,19.05 13.84,18.29 15.36,18.29 15.36,16.51 13.46,16.51 13.46,18.16
GND_POWER on TOP: 4.06,7.24 4.06,7.24 2.41,7.24 2.41,9.02 3.68,9.02 3.81,8.89 3.81,8.38 5.57,8.38 5.57,7.24 5.33,7.24
GND_POWER on TOP: 1.68,41.65 1.68,42.55 2.81,42.55 2.81,43.29 2.79,43.31 3.43,43.31 3.43,44.45 0.89,44.45 0.76,44.32 0.76,41.02 1.05,41.02
GND_POWER on TOP: 11.11,51.69 11.11,50.29 11.35,50.29 11.35,48.74 1.93,48.74 1.93,50.29 0.38,50.29 0.38,51.69 5.89,51.69 5.89,50.29 9.73,50.29 9.73,51.69
GND_POWER on TOP: 14.66,27.08 12.46,27.08 12.46,29.23 13.59,29.23 13.59,30.48 13.99,30.48 13.99,29.23 14.61,29.23 14.61,28.6 15.85,28.6 15.85,26.49 14.66,26.49
GND_POWER on BOTTOM: 0.38,51.69 16.16,51.69 16.16,5.4 0.38,5.4 0.38,30.73 1.27,30.73 1.27,30.99 0.38,30.99 0.38,38.99 0.76,38.99 0.76,39.24 0.38,39.24 ; 20 cut-outs
GND_POWER on L2 - GND: 0.38,51.69 16.16,51.69 16.16,5.4 0.38,5.4
VBAT on TOP (solid shape): 9.94,29.04 9.98,29.04 10.03,29.04 10.08,29.05 11.15,29.05 11.21,29.03 11.23,28.97 11.23,28.78 11.25,28.72 11.31,28.7 11.32,28.7 11.35,28.69 11.36,28.68 11.42,28.64 11.5,28.63 12.2,28.63 12.21,28.63 12.27,28.58 12.28,28.55 12.29,28.52 12.29,27.8 12.28,27.77 12.27,27.75 12.21,27.69 12.2,27.69 11.5,27.69 11.47,27.69 11.44,27.68 11.31,27.68 11.25,27.66 11.23,27.61 11.23,27.35 11.21,27.3 11.15,27.27 9.69,27.27 9.63,27.3 9.61,27.35 9.61,28.97 9.63,29.03 9.69,29.05 9.89,29.05
VBAT on TOP (solid shape): 0.61,29.35 0.66,29.35 0.7,29.35 0.75,29.36 1.9,29.36 1.9,29.36 1.9,29.09 1.92,29.03 1.98,29.01 2.12,29.01 2.14,29 2.16,28.99 2.22,28.95 2.3,28.94 2.97,28.94 3.02,28.92 3.04,28.86 3.04,28.11 3.04,28.08 3.02,28.05 2.99,28.03 2.97,28.01 2.94,28 2.3,28 2.27,28 2.23,27.99 1.98,27.99 1.92,27.97 1.9,27.92 1.9,27.66 1.88,27.61 1.83,27.58 0.75,27.58 0.7,27.59 0.66,27.59 0.61,27.59 0.57,27.58 0.45,27.58 0.4,27.61 0.38,27.66 0.38,29.28 0.4,29.34 0.45,29.36 0.57,29.36
VBAT on TOP: 1.27,12.7 2.16,12.7 2.16,11.84 3.04,10.95 3.55,10.95 3.55,10.67 4.06,10.67 4.06,10.29 4.06,10.29 4.06,9.78 7.49,9.78 7.49,8.51 4.06,8.51 4.06,9.02 3.8,9.27 3.81,9.27 3.81,9.4 2.41,9.4 2.41,10.41 2.13,10.69 1.88,10.69 1.88,11.63 1.7,11.81 1.27,11.81
VBAT on L3 - POWER: 0.38,7.49 0.38,51.69 16.16,51.69 16.16,7.49
(no net) on TOP: 12.29,28.7 12.29,27.68 11.23,27.68 11.23,27.27 9.43,27.27 9.43,29.05 11.23,29.05 11.23,28.7
(no net) on TOP: 2.96,27.99 1.9,27.99 1.9,27.58 0.38,27.58 0.38,29.36 1.9,29.36 1.9,29.01 2.96,29.01 3.04,28.93 3.04,28.08
(no net) on TOP: 5.46,27.39 3.26,27.39 3.26,29.54 4.38,29.54 4.38,30.79 4.79,30.79 4.79,29.54 5.41,29.54 5.41,28.91 6.65,28.91 6.65,26.8 5.46,26.8
VCHG on TOP: 9.79,47.24 11.3,47.24 11.3,48.58 1.93,48.58 1.93,46.87 6.65,46.87 6.65,44.42 9.73,44.42 9.73,43.56 11.3,43.56 11.3,44.96 10.66,44.96 9.79,45.83
N15078736 on TOP: 3.43,43.69 4.85,43.69 5.29,43.25 6.43,43.25 6.53,43.15 6.53,41.97 9.73,41.97 9.73,44.42 6.01,44.42 5.67,44.07 3.43,44.07
GND_POWER on TOP (solid shape): 4.71,30.79 4.77,30.77 4.79,30.71 4.79,29.62 4.81,29.57 4.87,29.54 5.34,29.54 5.39,29.52 5.41,29.47 5.41,28.98 5.43,28.93 5.49,28.91 6.57,28.91 6.63,28.88 6.65,28.83 6.65,26.87 6.63,26.82 6.57,26.8 5.53,26.8 5.48,26.82 5.46,26.87 5.46,27.32 5.43,27.37 5.38,27.39 3.34,27.39 3.28,27.41 3.26,27.47 3.26,29.53 3.27,29.54 4.31,29.54 4.36,29.57 4.38,29.62 4.38,30.71 4.41,30.77 4.46,30.79

## Text on the board
Ref Des/Silkscreen Bottom: WOWL | Gone Fishing | 1010309-900-0012_Rev.A
XSECTION_CHART: *  SURFACE | * ENIG_TOP MASK | * SOLDERMASK_TOP MASK | L1 TOP CONDUCTOR | *  DIELECTRIC | L2 L2 - GND PLANE | L3 L3 - POWER CONDUCTOR | L4 BOTTOM CONDUCTOR | * SOLDERMASK_BOTTOM MASK | * ENIG_BOTTOM MASK | DESIGN CROSS SECTION CHART | ___________________________ | TOTAL THICKNESS 25.86 MIL | 1-4
User.45: FIGURE | FINISHED_SIZE | 10.0 | 15.748 | 27.559 | 70.079 | 171.26x13.78 | DRILL CHART: TOP to BOTTOM | ALL UNITS ARE IN MILS | TOLERANCE_DRILL | +3.0/-10.0 | +0.0/-0.0 | +3.0/-3.0 | +3.15/-3.15 | PLATED | NON-PLATED | QTY | 143 | 2 | 4 | 3
